# Altium PCB INDICATOR.PcbDoc
Units mm, origin at the board's own origin, x right, y up, seen from the top; angles counter-clockwise.
Board outline 148 x 64 mm, 2 copper layers (Top Layer, Bottom Layer); 90 components, 79 nets, 322 pads, 0 vias.
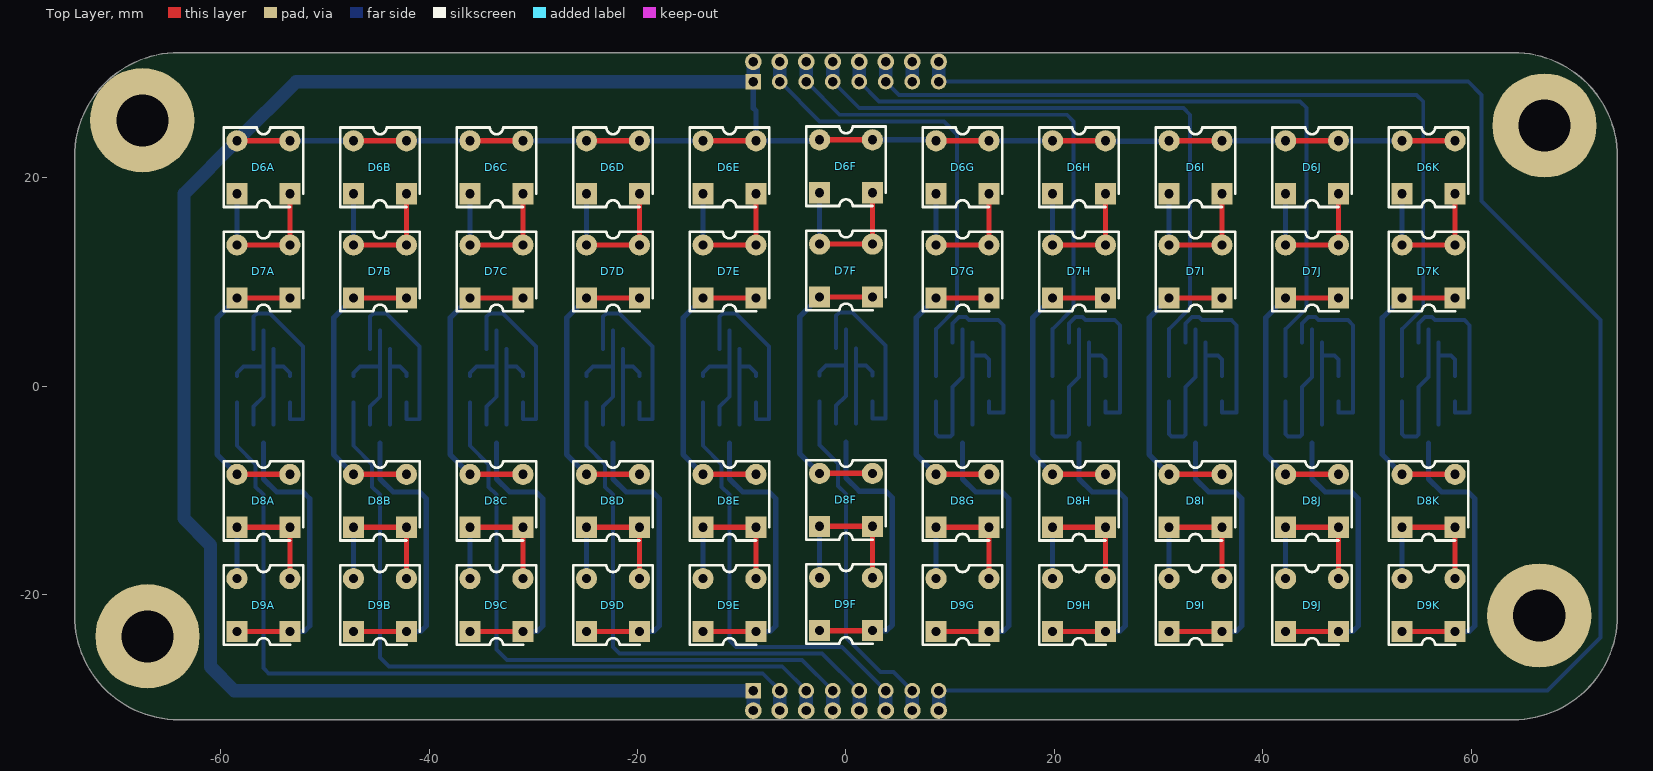
[diagram p0: Top Layer view]
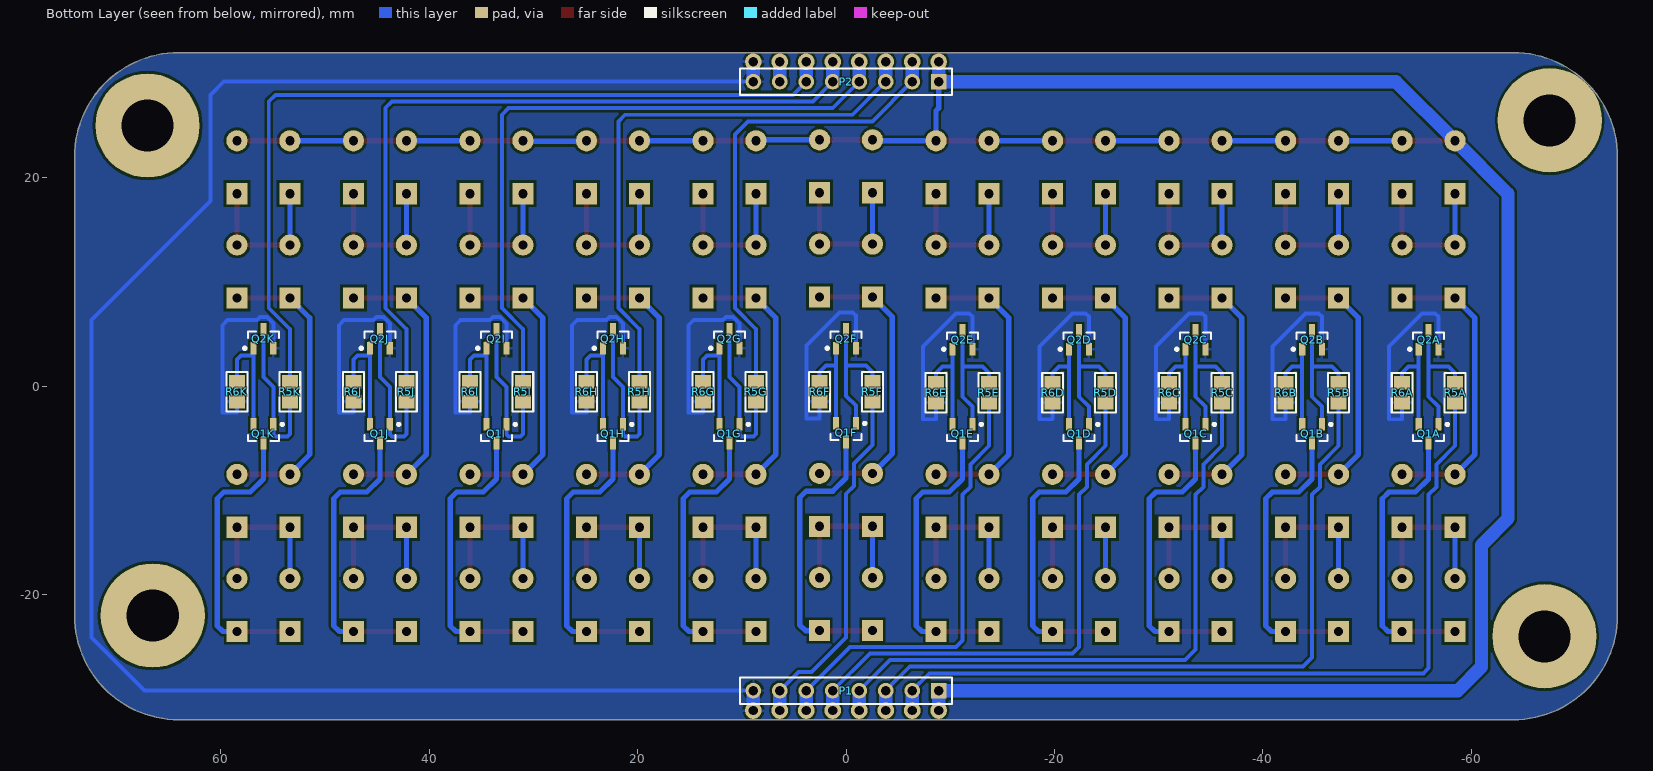
[diagram p1: Bottom Layer view, seen from below]
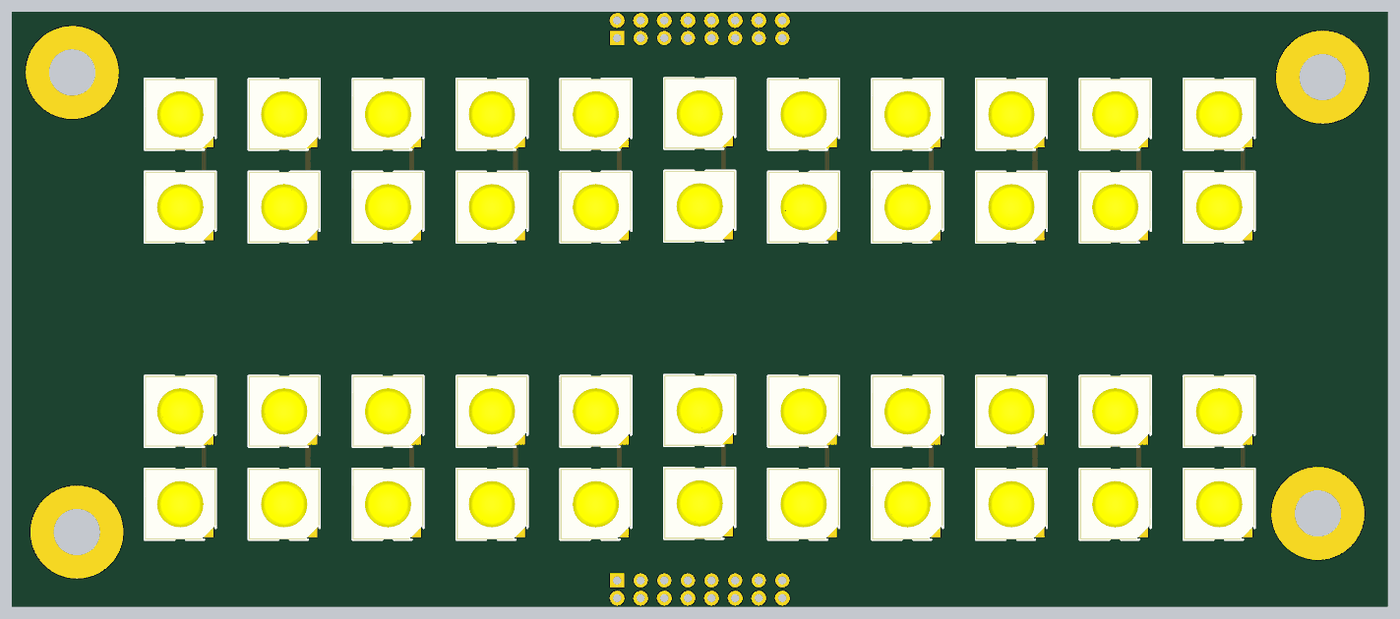
[diagram p2: 3D render of the assembled board from above, using the file's embedded part models]

## Layer stack, top to bottom
Top Solder: solder mask 0.0102, Solder Resist, Dk 3.5
Top Layer: signal copper 0.0356
Dielectric1: dielectric 0.32, FR-4, Dk 4.8
Bottom Layer: signal copper 0.0356
Bottom Solder: solder mask 0.0102, Solder Resist, Dk 3.5

## Board outline
-74,-22 -74,22 cw(c-64,22) -64,32 64,32 cw(c64,22) 74,22 74,-22 cw(c64,-22) 64,-32 -64,-32 cw(c-64,-22)

## Design rules (kind name [scope] priority, off if disabled: settings)
Clearance [All] p1: gap=0.254
PolygonConnect [All] p1: connectstyle=Relief reliefconductorwidth=0.254 reliefentries=4 polygonreliefangle="90 Angle" airgapwidth=0.254
RoomDefinition U_LEDSANDDRIVER6 [InComponentClass('U_LEDSANDDRIVER6')] p1: confinementstyle=ConfineIn formatcopy=FALSE lockcomponents=FALSE outline -5.588,-25.908 5.588,-25.908 5.588,26.092 -5.588,26.092
RoomDefinition INDICATOR [InComponentClass('INDICATOR')] p2: confinementstyle=ConfineIn formatcopy=TRUE lockcomponents=FALSE outline -73.66,-32 74.168,-32 74.168,32 -73.66,32
RoomDefinition U_LEDSANDDRIVER11 [InComponentClass('U_LEDSANDDRIVER11')] p3: confinementstyle=ConfineIn formatcopy=TRUE lockcomponents=FALSE outline 50.292,-26 61.468,-26 61.468,26 50.292,26
RoomDefinition U_LEDSANDDRIVER10 [InComponentClass('U_LEDSANDDRIVER10')] p4: confinementstyle=ConfineIn formatcopy=TRUE lockcomponents=FALSE outline 39.116,-26 50.292,-26 50.292,26 39.116,26
RoomDefinition U_LEDSANDDRIVER9 [InComponentClass('U_LEDSANDDRIVER9')] p5: confinementstyle=ConfineIn formatcopy=TRUE lockcomponents=FALSE outline 27.94,-26 39.116,-26 39.116,26 27.94,26
RoomDefinition U_LEDSANDDRIVER8 [InComponentClass('U_LEDSANDDRIVER8')] p6: confinementstyle=ConfineIn formatcopy=TRUE lockcomponents=FALSE outline 16.764,-26 27.94,-26 27.94,26 16.764,26
RoomDefinition U_LEDSANDDRIVER7 [InComponentClass('U_LEDSANDDRIVER7')] p7: confinementstyle=ConfineIn formatcopy=TRUE lockcomponents=FALSE outline 5.588,-26 16.764,-26 16.764,26 5.588,26
RoomDefinition U_LEDSANDDRIVER5 [InComponentClass('U_LEDSANDDRIVER5')] p8: confinementstyle=ConfineIn formatcopy=FALSE lockcomponents=FALSE outline -16.764,-26 -5.588,-26 -5.588,26 -16.764,26
RoomDefinition U_LEDSANDDRIVER4 [InComponentClass('U_LEDSANDDRIVER4')] p9: confinementstyle=ConfineIn formatcopy=FALSE lockcomponents=FALSE outline -27.94,-26 -16.764,-26 -16.764,26 -27.94,26
RoomDefinition U_LEDSANDDRIVER3 [InComponentClass('U_LEDSANDDRIVER3')] p10: confinementstyle=ConfineIn formatcopy=FALSE lockcomponents=FALSE outline -39.116,-26 -27.94,-26 -27.94,26 -39.116,26
RoomDefinition U_LEDSANDDRIVER2 [InComponentClass('U_LEDSANDDRIVER2')] p11: confinementstyle=ConfineIn formatcopy=FALSE lockcomponents=FALSE outline -50.292,-26 -39.116,-26 -39.116,26 -50.292,26
RoomDefinition U_LEDSANDDRIVER1 [InComponentClass('U_LEDSANDDRIVER1')] p12: confinementstyle=ConfineIn formatcopy=FALSE lockcomponents=FALSE outline -61.468,-26 -50.292,-26 -50.292,26 -61.468,26
RoutingVias [All] p1: holewidth=0.8 width=1.6 viastyle="Through Hole" minholewidth=0.711 minwidth=1.27 maxholewidth=5 maxwidth=40
SolderMaskExpansion [All] p1: expansion=0.102
Width [All] p1: maxlimit=2.54 minlimit=0.254 preferedwidth=0.254
29 further rules are at their usual default settings.

## Classes and differential pairs
net class DRIVE[1..11]: DRIVE1 DRIVE2 DRIVE3 DRIVE4 DRIVE5 DRIVE6 DRIVE7 DRIVE8 DRIVE9 DRIVE10 DRIVE11 DRIVE13 DRIVE14 DRIVE15 DRIVE16
channel class "LEDS AND DRIVER": U_LEDSANDDRIVER1 U_LEDSANDDRIVER2 U_LEDSANDDRIVER3 U_LEDSANDDRIVER4 U_LEDSANDDRIVER5 U_LEDSANDDRIVER6 U_LEDSANDDRIVER7 U_LEDSANDDRIVER8 U_LEDSANDDRIVER9 U_LEDSANDDRIVER10 U_LEDSANDDRIVER11 U_LEDSANDDRIVER12
component class U_LEDSANDDRIVER11: D6K D7K D8K D9K Q1K Q2K R5K R6K
component class U_LEDSANDDRIVER10: D6J D7J D8J D9J Q1J Q2J R5J R6J
component class U_LEDSANDDRIVER9: D6I D7I D8I D9I Q1I Q2I R5I R6I
component class U_LEDSANDDRIVER8: D6H D7H D8H D9H Q1H Q2H R5H R6H
component class U_LEDSANDDRIVER7: D6G D7G D8G D9G Q1G Q2G R5G R6G
component class U_LEDSANDDRIVER6: D6F D7F D8F D9F Q1F Q2F R5F R6F
component class U_LEDSANDDRIVER5: D6E D7E D8E D9E Q1E Q2E R5E R6E
component class U_LEDSANDDRIVER4: D6D D7D D8D D9D Q1D Q2D R5D R6D
component class U_LEDSANDDRIVER3: D6C D7C D8C D9C Q1C Q2C R5C R6C
component class U_LEDSANDDRIVER2: D6B D7B D8B D9B Q1B Q2B R5B R6B
component class U_LEDSANDDRIVER1: D6A D7A D8A D9A Q1A Q2A R5A R6A
component class INDICATOR: P1 P2

## Components (designator, comment, footprint, x,y, rotation, side; value= is the part's Value field where it differs from the comment)
D6A "Value" "LED SUPERFLUX AMBER" -55.88,21 r180 top (schematic designator D6)
D6B "Value" "LED SUPERFLUX AMBER" -44.704,21 r180 top (schematic designator D6)
D6C "Value" "LED SUPERFLUX AMBER" -33.528,21 r180 top (schematic designator D6)
D6D "Value" "LED SUPERFLUX AMBER" -22.352,21 r180 top (schematic designator D6)
D6E "Value" "LED SUPERFLUX AMBER" -11.176,21 r180 top (schematic designator D6)
D6F "Value" "LED SUPERFLUX AMBER" 0,21.092 r180 top (schematic designator D6)
D6G "Value" "LED SUPERFLUX AMBER" 11.176,21 r180 top (schematic designator D6)
D6H "Value" "LED SUPERFLUX AMBER" 22.352,21 r180 top (schematic designator D6)
D6I "Value" "LED SUPERFLUX AMBER" 33.528,21 r180 top (schematic designator D6)
D6J "Value" "LED SUPERFLUX AMBER" 44.704,21 r180 top (schematic designator D6)
D6K "Value" "LED SUPERFLUX AMBER" 55.88,21 r180 top (schematic designator D6)
D7A "Value" "LED SUPERFLUX AMBER" -55.88,11 r180 top (schematic designator D7)
D7B "Value" "LED SUPERFLUX AMBER" -44.704,11 r180 top (schematic designator D7)
D7C "Value" "LED SUPERFLUX AMBER" -33.528,11 r180 top (schematic designator D7)
D7D "Value" "LED SUPERFLUX AMBER" -22.352,11 r180 top (schematic designator D7)
D7E "Value" "LED SUPERFLUX AMBER" -11.176,11 r180 top (schematic designator D7)
D7F "Value" "LED SUPERFLUX AMBER" 0,11.092 r180 top (schematic designator D7)
D7G "Value" "LED SUPERFLUX AMBER" 11.176,11 r180 top (schematic designator D7)
D7H "Value" "LED SUPERFLUX AMBER" 22.352,11 r180 top (schematic designator D7)
D7I "Value" "LED SUPERFLUX AMBER" 33.528,11 r180 top (schematic designator D7)
D7J "Value" "LED SUPERFLUX AMBER" 44.704,11 r180 top (schematic designator D7)
D7K "Value" "LED SUPERFLUX AMBER" 55.88,11 r180 top (schematic designator D7)
D8A "Value" "LED SUPERFLUX AMBER" -55.88,-11 r180 top (schematic designator D8)
D8B "Value" "LED SUPERFLUX AMBER" -44.704,-11 r180 top (schematic designator D8)
D8C "Value" "LED SUPERFLUX AMBER" -33.528,-11 r180 top (schematic designator D8)
D8D "Value" "LED SUPERFLUX AMBER" -22.352,-11 r180 top (schematic designator D8)
D8E "Value" "LED SUPERFLUX AMBER" -11.176,-11 r180 top (schematic designator D8)
D8F "Value" "LED SUPERFLUX AMBER" 0,-10.908 r180 top (schematic designator D8)
D8G "Value" "LED SUPERFLUX AMBER" 11.176,-11 r180 top (schematic designator D8)
D8H "Value" "LED SUPERFLUX AMBER" 22.352,-11 r180 top (schematic designator D8)
D8I "Value" "LED SUPERFLUX AMBER" 33.528,-11 r180 top (schematic designator D8)
D8J "Value" "LED SUPERFLUX AMBER" 44.704,-11 r180 top (schematic designator D8)
D8K "Value" "LED SUPERFLUX AMBER" 55.88,-11 r180 top (schematic designator D8)
D9A "Value" "LED SUPERFLUX AMBER" -55.88,-21 r180 top (schematic designator D9)
D9B "Value" "LED SUPERFLUX AMBER" -44.704,-21 r180 top (schematic designator D9)
D9C "Value" "LED SUPERFLUX AMBER" -33.528,-21 r180 top (schematic designator D9)
D9D "Value" "LED SUPERFLUX AMBER" -22.352,-21 r180 top (schematic designator D9)
D9E "Value" "LED SUPERFLUX AMBER" -11.176,-21 r180 top (schematic designator D9)
D9F "Value" "LED SUPERFLUX AMBER" 0,-20.908 r180 top (schematic designator D9)
D9G "Value" "LED SUPERFLUX AMBER" 11.176,-21 r180 top (schematic designator D9)
D9H "Value" "LED SUPERFLUX AMBER" 22.352,-21 r180 top (schematic designator D9)
D9I "Value" "LED SUPERFLUX AMBER" 33.528,-21 r180 top (schematic designator D9)
D9J "Value" "LED SUPERFLUX AMBER" 44.704,-21 r180 top (schematic designator D9)
D9K "Value" "LED SUPERFLUX AMBER" 55.88,-21 r180 top (schematic designator D9)
P1 "Header 8" HDR1X8 -8.89,-29.21 r0 bottom
P2 "Header 8" HDR1X8 -8.89,29.21 r0 bottom
Q1A "BC817" SOT23-3L -55.88,-4.572 r270 bottom (schematic designator Q1)
Q1B "BC817" SOT23-3L -44.704,-4.572 r270 bottom (schematic designator Q1)
Q1C "BC817" SOT23-3L -33.528,-4.572 r270 bottom (schematic designator Q1)
Q1D "BC817" SOT23-3L -22.352,-4.572 r270 bottom (schematic designator Q1)
Q1E "BC817" SOT23-3L -11.176,-4.572 r270 bottom (schematic designator Q1)
Q1F "BC817" SOT23-3L 0,-4.48 r270 bottom (schematic designator Q1)
Q1G "BC817" SOT23-3L 11.176,-4.572 r270 bottom (schematic designator Q1)
Q1H "BC817" SOT23-3L 22.352,-4.572 r270 bottom (schematic designator Q1)
Q1I "BC817" SOT23-3L 33.528,-4.572 r270 bottom (schematic designator Q1)
Q1J "BC817" SOT23-3L 44.704,-4.572 r270 bottom (schematic designator Q1)
Q1K "BC817" SOT23-3L 55.88,-4.572 r270 bottom (schematic designator Q1)
Q2A "BC817" SOT23-3L -55.88,4.445 r90 bottom (schematic designator Q2)
Q2B "BC817" SOT23-3L -44.704,4.445 r90 bottom (schematic designator Q2)
Q2C "BC817" SOT23-3L -33.528,4.445 r90 bottom (schematic designator Q2)
Q2D "BC817" SOT23-3L -22.352,4.445 r90 bottom (schematic designator Q2)
Q2E "BC817" SOT23-3L -11.176,4.445 r90 bottom (schematic designator Q2)
Q2F "BC817" SOT23-3L 0,4.537 r90 bottom (schematic designator Q2)
Q2G "BC817" SOT23-3L 11.176,4.537 r90 bottom (schematic designator Q2)
Q2H "BC817" SOT23-3L 22.352,4.537 r90 bottom (schematic designator Q2)
Q2I "BC817" SOT23-3L 33.528,4.537 r90 bottom (schematic designator Q2)
Q2J "BC817" SOT23-3L 44.704,4.537 r90 bottom (schematic designator Q2)
Q2K "BC817" SOT23-3L 55.88,4.537 r90 bottom (schematic designator Q2)
R5A "1k" "RES (3D) - 0805" -58.42,-0.635 r270 bottom (schematic designator R5)
R5B "1k" "RES (3D) - 0805" -47.244,-0.635 r270 bottom (schematic designator R5)
R5C "1k" "RES (3D) - 0805" -36.068,-0.635 r270 bottom (schematic designator R5)
R5D "1k" "RES (3D) - 0805" -24.892,-0.635 r270 bottom (schematic designator R5)
R5E "1k" "RES (3D) - 0805" -13.716,-0.635 r270 bottom (schematic designator R5)
R5F "1k" "RES (3D) - 0805" -2.54,-0.543 r270 bottom (schematic designator R5)
R5G "1k" "RES (3D) - 0805" 8.636,-0.543 r90 bottom (schematic designator R5)
R5H "1k" "RES (3D) - 0805" 19.812,-0.543 r90 bottom (schematic designator R5)
R5I "1k" "RES (3D) - 0805" 30.988,-0.543 r90 bottom (schematic designator R5)
R5J "1k" "RES (3D) - 0805" 42.164,-0.543 r90 bottom (schematic designator R5)
R5K "1k" "RES (3D) - 0805" 53.34,-0.543 r90 bottom (schematic designator R5)
R6A "35R" "RES (3D) - 0805" -53.34,-0.635 r90 bottom (schematic designator R6)
R6B "35R" "RES (3D) - 0805" -42.164,-0.635 r90 bottom (schematic designator R6)
R6C "35R" "RES (3D) - 0805" -30.988,-0.635 r90 bottom (schematic designator R6)
R6D "35R" "RES (3D) - 0805" -19.812,-0.635 r90 bottom (schematic designator R6)
R6E "35R" "RES (3D) - 0805" -8.636,-0.635 r90 bottom (schematic designator R6)
R6F "35R" "RES (3D) - 0805" 2.54,-0.543 r90 bottom (schematic designator R6)
R6G "35R" "RES (3D) - 0805" 13.716,-0.543 r90 bottom (schematic designator R6)
R6H "35R" "RES (3D) - 0805" 24.892,-0.543 r90 bottom (schematic designator R6)
R6I "35R" "RES (3D) - 0805" 36.068,-0.543 r90 bottom (schematic designator R6)
R6J "35R" "RES (3D) - 0805" 47.244,-0.543 r90 bottom (schematic designator R6)
R6K "35R" "RES (3D) - 0805" 58.42,-0.543 r90 bottom (schematic designator R6)

## Footprints (in the part's own frame and the unit in brackets; to place one, negate y for a bottom-side part, rotate by r counter-clockwise, add the part's x,y. Pads: shape width x height; smd on the part's side, far side on the other; paste and mask are expansions set on the pad)
HDR1X8 [mm] "Connector; Header; 8 Position"
  rect 1.5x1.5 hole 0.9: 1(0,0)
  round 1.5 hole 0.9: 2(2.54,0) 3(5.08,0) 4(7.62,0) 5(10.16,0) 6(12.7,0) 7(15.24,0) 8(17.78,0)
  silkscreen extent -1.27,-1.27 19.05,1.27
"LED SUPERFLUX AMBER" [mil]
  round 80 hole 35: 1(-100,-100) 1(100,-100)
  rect 80x80 hole 35: 2(-100,100) 2(100,100)
  silkscreen extent -150,-150 150,150, body extent -150,-150 150,150, height 272
"RES (3D) - 0805" [mm]
  rect 1.3x1.5 smd: 1(-0.95,0) 2(0.95,0)
  silkscreen extent -1.91,-0.99 1.91,0.99, body extent -1,-0.63 1,0.63, height 1
SOT23-3L [mm] "SOT23, 3-Leads, Body 2.9x1.3mm, Pitch 0.95mm, Lead Span 2.5mm, IPC High Density"
  rect 1.2x0.6 smd: 1(-0.9,0.95) 2(-0.9,-0.95) 3(0.9,0)
  silkscreen extent -1.02,-1.5 0.7,1.92, body extent -1.25,-1.5 1.25,1.5, height 1.12

## Part data
D6A D6B D6C D6D D6E D6F D6G D6H D6I D6J D6K D7A D7B D7C D7D D7E D7F D7G D7H D7I D7J D7K D8A D8B D8C D8D D8E D8F D8G D8H D8I D8J D8K D9A D9B D9C D9D D9E D9F D9G D9H D9I D9J D9K: library part "LED 3mm RED", "LED 55"
P1 P2: "Header, 8-Pin"
Q1A Q1B Q1C Q1D Q1E Q1F Q1G Q1H Q1I Q1J Q1K Q2A Q2B Q2C Q2D Q2E Q2F Q2G Q2H Q2I Q2J Q2K: "NPN Bipolar Transistor"
R5A R5B R5C R5D R5E R5F R5G R5H R5I R5J R5K R6A R6B R6C R6D R6E R6F R6G R6H R6I R6J R6K: library part "RES SMD 0603 1k", "RESISTOR SMD 0603 1k"

## Free pads (board coordinates)
  round 10 hole 5: 0(-67.5,25.5) 0(-67,-24) 0(66.5,-22) 0(67,25)
  round 1.6 hole 0.9: 0(-8.89,31.115) 0(-8.89,-31.115) 0(-6.35,31.115) 0(-6.35,-31.115) 0(-3.81,31.115) 0(-3.81,-31.115) 0(-1.27,31.115) 0(-1.27,-31.115) 0(1.27,31.115) 0(1.27,-31.115) 0(3.81,31.115) 0(3.81,-31.115) 0(6.35,31.115) 0(6.35,-31.115) 0(8.89,31.115) 0(8.89,-31.115)

## Nets (pads, with @x,y where several pads share a name; then routed paths per layer and width w, separated by ;. In a path a pad name is that pad's centre, name@x,y a point inside that pad or via, vN(x,y) a via of type N, cw(c..) or ccw(c..) an arc to the next point about the centre after c; other vN are vias at no path point)
DRIVE1: P1.2 pad.0@-6.35,-31.115 R5A.2 | length 78.8
  Bottom Layer w0.381: R5A.2 -58.42,-5.715 -56.642,-7.493 -56.642,-9.652 -55.88,-10.414 -55.88,-27.051 -55.39,-27.541 -8.019,-27.541 P1.2
  Bottom Layer w1.27: pad.0@-6.35,-31.115 P1.2
DRIVE2: P1.3 pad.0@-3.81,-31.115 R5B.2 | length 69.6
  Bottom Layer w0.381: R5B.2 -47.244,-5.715 -45.466,-7.493 -45.466,-9.652 -44.704,-10.414 -44.704,-26.035 -43.833,-26.906 -6.114,-26.906 P1.3
  Bottom Layer w1.27: pad.0@-3.81,-31.115 P1.3
DRIVE3: P1.4 pad.0@-1.27,-31.115 R5C.2 | length 60.5
  Bottom Layer w0.381: R5C.2 -36.068,-5.715 -34.29,-7.493 -34.29,-9.652 -33.528,-10.414 -33.528,-25.273 -32.53,-26.271 -4.209,-26.271 P1.4
  Bottom Layer w1.27: pad.0@-1.27,-31.115 P1.4
DRIVE4: P1.5 pad.0@1.27,-31.115 R5D.2 | length 51.1
  Bottom Layer w0.381: R5D.2 -24.892,-5.715 -23.114,-7.493 -23.114,-9.652 -22.352,-10.414 -22.352,-25.019 -21.735,-25.636 -2.304,-25.636 P1.5
  Bottom Layer w1.27: pad.0@1.27,-30.48 P1.5
DRIVE5: P1.6 pad.0@3.81,-31.115 R5E.2 | length 42.7
  Bottom Layer w0.381: R5E.2 -13.716,-5.715 -11.938,-7.493 -11.938,-9.652 -11.176,-10.414 -11.176,-24.384 -10.559,-25.001 -0.399,-25.001 P1.6
  Bottom Layer w1.27: pad.0@3.81,-31.115 P1.6
DRIVE6: P1.7 pad.0@6.35,-31.115 R5F.2 | length 34
  Bottom Layer w0.381: R5F.2 -2.54,-5.623 -0.762,-7.401 -0.762,-9.56 0,-10.322 0,-24.13 3.302,-27.432 4.572,-27.432 P1.7
  Bottom Layer w1.27: pad.0@6.35,-31.115 P1.7
DRIVE7: P2.2 pad.0@-6.35,31.115 R5G.2 | length 45
  Bottom Layer w0.381: P2.2 -2.54,25.4 9.398,25.4 10.668,24.13 10.668,7.493 8.636,5.461 R5G.2@8.636,0.95
  Bottom Layer w1.27: P2.2 pad.0@-6.35,31.115
DRIVE8: P2.3 pad.0@-3.81,31.115 R5H.2 | length 53.8
  Bottom Layer w0.381: P2.3 -0.635,26.035 21.209,26.035 21.844,25.4 21.844,7.493 19.812,5.461 R5H.2@19.812,0.95
  Bottom Layer w1.27: P2.3@-3.81,29.845 pad.0@-3.81,31.115
DRIVE9: P2.4 pad.0@-1.27,31.115 R5I.2 | length 79.3
  Bottom Layer w0.381: P2.4 1.27,26.67 32.385,26.67 33.02,26.035 33.02,24.13 ; R5I.2@30.988,0.95 30.988,5.461 33.02,7.493 33.02,24.13 ; 33.02,7.62 33.02,24.13
  Bottom Layer w1.27: P2.4@-1.27,29.845 pad.0@-1.27,31.115
DRIVE10: P2.5 pad.0@1.27,31.115 R5J.2 | length 89
  Bottom Layer w0.381: P2.5 3.175,27.305 43.561,27.305 44.196,26.67 44.196,7.62 ; R5J.2@42.164,0.95 42.164,5.461 44.196,7.493 44.196,24.13
  Bottom Layer w1.27: P2.5 pad.0@1.27,31.115
DRIVE11: P2.6 pad.0@3.81,31.115 R5K.2 | length 97.3
  Bottom Layer w0.381: P2.6 5.08,27.94 54.737,27.94 55.372,27.305 55.372,7.62 ; R5K.2@53.34,0.95 53.34,5.461 55.372,7.493 55.372,24.13
  Bottom Layer w1.27: P2.6@3.81,29.845 pad.0@3.81,31.115
GND: P1.8 P2.8 pad.0@8.89,31.115 pad.0@8.89,-31.115 Q2A.2 Q2B.2 Q2C.2 Q2D.2 Q2E.2 Q2F.2 Q2G.2 Q2H.2 Q2I.2 Q2J.2 Q2K.2 R6A.1 R6B.1 R6C.1 R6D.1 R6E.1 R6F.1 R6G.1 R6H.1 R6I.1 R6J.1 R6K.1 | length 384.5
  Bottom Layer w0.381: Q2A.2 -56.83,6.67 -56.515,6.985 -55.245,6.985 -52.07,3.81 -52.07,-3.175 -53.34,-3.175 R6A.1 ; Q2B.2 -45.654,6.67 -45.339,6.985 -44.069,6.985 -40.894,3.81 -40.894,-3.175 -42.164,-3.175 R6B.1 ; Q2C.2 -34.478,6.67 -34.163,6.985 -32.893,6.985 -29.718,3.81 -29.718,-3.175 -30.988,-3.175 R6C.1 ; Q2D.2 -23.302,6.67 -22.987,6.985 -21.717,6.985 -18.542,3.81 -18.542,-3.175 -19.812,-3.175 R6D.1 ; Q2E.2 -12.126,6.67 -11.811,6.985 -10.541,6.985 -7.366,3.81 -7.366,-3.175 -8.636,-3.175 R6E.1 ; Q2F.2 -0.95,6.762 -0.635,7.077 0.635,7.077 3.81,3.902 3.81,-3.083 2.54,-3.083 R6F.1 ; P1.8 67.31,-29.21 72.39,-24.13 72.39,6.35 60.96,17.78 60.96,27.94 59.69,29.21 P2.8 ; Q2G.2@10.226,4.18 10.226,6.016 10.825,6.615 11.527,6.615 11.792,6.35 14.605,6.35 15.113,5.842 15.113,-2.54 13.716,-2.54 R6G.1 ; Q2H.2@21.402,4.18 21.402,6.016 22.001,6.615 22.703,6.615 22.968,6.35 25.781,6.35 26.289,5.842 26.289,-2.54 24.892,-2.54 R6H.1 ; Q2I.2@32.578,4.18 32.578,6.016 33.177,6.615 33.879,6.615 34.144,6.35 36.957,6.35 37.465,5.842 37.465,-2.54 36.068,-2.54 R6I.1 ; Q2J.2@43.754,4.18 43.754,6.016 44.353,6.615 45.055,6.615 45.32,6.35 48.133,6.35 48.641,5.842 48.641,-2.54 47.244,-2.54 R6J.1 ; Q2K.2@54.93,4.18 54.93,6.016 55.529,6.615 56.231,6.615 56.496,6.35 59.309,6.35 59.817,5.842 59.817,-2.54 58.42,-2.54 R6K.1
  Bottom Layer w1.27: pad.0@8.89,-31.115 P1.8 ; P2.8 pad.0@8.89,31.115
NetD6A_2: D6A.2 D7A.1 | length 14.9
  Top Layer w0.508: D7A.1@-58.42,13.54 -53.34,13.54 D6A.2@-53.34,18.46
  Bottom Layer w0.508: D7A.1@-58.42,13.54 D6A.2@-58.42,18.46
NetD6B_2: D6B.2 D7B.1 | length 14.9
  Top Layer w0.508: D7B.1@-47.244,13.54 -42.164,13.54 D6B.2@-42.164,18.46
  Bottom Layer w0.508: D7B.1@-47.244,13.54 D6B.2@-47.244,18.46
NetD6C_2: D6C.2 D7C.1 | length 14.9
  Top Layer w0.508: D7C.1@-36.068,13.54 -30.988,13.54 D6C.2@-30.988,18.46
  Bottom Layer w0.508: D7C.1@-36.068,13.54 D6C.2@-36.068,18.46
NetD6D_2: D6D.2 D7D.1 | length 14.9
  Top Layer w0.508: D7D.1@-24.892,13.54 -19.812,13.54 D6D.2@-19.812,18.46
  Bottom Layer w0.508: D7D.1@-24.892,13.54 D6D.2@-24.892,18.46
NetD6E_2: D6E.2 D7E.1 | length 14.9
  Top Layer w0.508: D7E.1@-13.716,13.54 -8.636,13.54 D6E.2@-8.636,18.46
  Bottom Layer w0.508: D7E.1@-13.716,13.54 D6E.2@-13.716,18.46
NetD6F_2: D6F.2 D7F.1 | length 14.9
  Top Layer w0.508: D7F.1@-2.54,13.632 D7F.1@2.54,13.632 ; D7F.1@2.54,13.632 D6F.2@2.54,18.552
  Bottom Layer w0.508: D7F.1@-2.54,13.632 D6F.2@-2.54,18.552
NetD6G_2: D6G.2 D7G.1 | length 14.9
  Top Layer w0.508: D7G.1@8.636,13.54 13.716,13.54 D6G.2@13.716,18.46
  Bottom Layer w0.508: D7G.1@8.636,13.54 D6G.2@8.636,18.46
NetD6H_2: D6H.2 D7H.1 | length 14.9
  Top Layer w0.508: D7H.1@19.812,13.54 24.892,13.54 D6H.2@24.892,18.46
  Bottom Layer w0.508: D7H.1@19.812,13.54 D6H.2@19.812,18.46
NetD6I_2: D6I.2 D7I.1 | length 14.9
  Top Layer w0.508: D7I.1@30.988,13.54 36.068,13.54 D6I.2@36.068,18.46
  Bottom Layer w0.508: D7I.1@30.988,13.54 D6I.2@30.988,18.46
NetD6J_2: D6J.2 D7J.1 | length 14.9
  Top Layer w0.508: D7J.1@42.164,13.54 47.244,13.54 D6J.2@47.244,18.46
  Bottom Layer w0.508: D7J.1@42.164,13.54 D6J.2@42.164,18.46
NetD6K_2: D6K.2 D7K.1 | length 14.9
  Top Layer w0.508: D7K.1@53.34,13.54 58.42,13.54 D6K.2@58.42,18.46
  Bottom Layer w0.508: D7K.1@53.34,13.54 D6K.2@53.34,18.46
NetD7A_2: D7A.2 D8A.1 | length 28.7
  Top Layer w0.508: D8A.1@-58.42,-8.46 D8A.1@-53.34,-8.46 ; D7A.2@-58.42,8.46 D7A.2@-53.34,8.46
  Bottom Layer w0.508: D8A.1@-58.42,-8.46 -60.325,-6.555 -60.325,6.555 D7A.2@-58.42,8.46
NetD7B_2: D7B.2 D8B.1 | length 28.7
  Top Layer w0.508: D8B.1@-47.244,-8.46 D8B.1@-42.164,-8.46 ; D7B.2@-47.244,8.46 D7B.2@-42.164,8.46
  Bottom Layer w0.508: D8B.1@-47.244,-8.46 -49.149,-6.555 -49.149,6.555 D7B.2@-47.244,8.46
NetD7C_2: D7C.2 D8C.1 | length 28.7
  Top Layer w0.508: D8C.1@-36.068,-8.46 D8C.1@-30.988,-8.46 ; D7C.2@-36.068,8.46 D7C.2@-30.988,8.46
  Bottom Layer w0.508: D8C.1@-36.068,-8.46 -37.973,-6.555 -37.973,6.555 D7C.2@-36.068,8.46
NetD7D_2: D7D.2 D8D.1 | length 28.7
  Top Layer w0.508: D8D.1@-24.892,-8.46 D8D.1@-19.812,-8.46 ; D7D.2@-24.892,8.46 D7D.2@-19.812,8.46
  Bottom Layer w0.508: D8D.1@-24.892,-8.46 -26.797,-6.555 -26.797,6.555 D7D.2@-24.892,8.46
NetD7E_2: D7E.2 D8E.1 | length 28.7
  Top Layer w0.508: D8E.1@-13.716,-8.46 D8E.1@-8.636,-8.46 ; D7E.2@-13.716,8.46 D7E.2@-8.636,8.46
  Bottom Layer w0.508: D8E.1@-13.716,-8.46 -15.621,-6.555 -15.621,6.555 D7E.2@-13.716,8.46
NetD7F_2: D7F.2 D8F.1 | length 28.7
  Top Layer w0.508: D8F.1@-2.54,-8.368 D8F.1@2.54,-8.368 ; D7F.2@-2.54,8.552 D7F.2@2.54,8.552
  Bottom Layer w0.508: D8F.1@-2.54,-8.368 -4.445,-6.463 -4.445,6.647 D7F.2@-2.54,8.552
NetD7G_2: D7G.2 D8G.1 | length 28.7
  Top Layer w0.508: D8G.1@8.636,-8.46 D8G.1@13.716,-8.46 ; D7G.2@8.636,8.46 D7G.2@13.716,8.46
  Bottom Layer w0.508: D8G.1@8.636,-8.46 6.731,-6.555 6.731,6.555 D7G.2@8.636,8.46
NetD7H_2: D7H.2 D8H.1 | length 28.7
  Top Layer w0.508: D8H.1@19.812,-8.46 D8H.1@24.892,-8.46 ; D7H.2@19.812,8.46 D7H.2@24.892,8.46
  Bottom Layer w0.508: D8H.1@19.812,-8.46 17.907,-6.555 17.907,6.555 D7H.2@19.812,8.46
NetD7I_2: D7I.2 D8I.1 | length 28.7
  Top Layer w0.508: D8I.1@30.988,-8.46 D8I.1@36.068,-8.46 ; D7I.2@30.988,8.46 D7I.2@36.068,8.46
  Bottom Layer w0.508: D8I.1@30.988,-8.46 29.083,-6.555 29.083,6.555 D7I.2@30.988,8.46
NetD7J_2: D7J.2 D8J.1 | length 28.7
  Top Layer w0.508: D8J.1@42.164,-8.46 D8J.1@47.244,-8.46 ; D7J.2@42.164,8.46 D7J.2@47.244,8.46
  Bottom Layer w0.508: D8J.1@42.164,-8.46 40.259,-6.555 40.259,6.555 D7J.2@42.164,8.46
NetD7K_2: D7K.2 D8K.1 | length 28.7
  Top Layer w0.508: D8K.1@53.34,-8.46 D8K.1@58.42,-8.46 ; D7K.2@53.34,8.46 D7K.2@58.42,8.46
  Bottom Layer w0.508: D8K.1@53.34,-8.46 51.435,-6.555 51.435,6.555 D7K.2@53.34,8.46
NetD8A_2: D8A.2 D9A.1 | length 14.9
  Top Layer w0.508: D8A.2@-58.42,-13.54 -53.34,-13.54 D9A.1@-53.34,-18.46
  Bottom Layer w0.508: D9A.1@-58.42,-18.46 D8A.2@-58.42,-13.54
NetD8B_2: D8B.2 D9B.1 | length 14.9
  Top Layer w0.508: D8B.2@-47.244,-13.54 -42.164,-13.54 D9B.1@-42.164,-18.46
  Bottom Layer w0.508: D9B.1@-47.244,-18.46 D8B.2@-47.244,-13.54
NetD8C_2: D8C.2 D9C.1 | length 14.9
  Top Layer w0.508: D8C.2@-36.068,-13.54 -30.988,-13.54 D9C.1@-30.988,-18.46
  Bottom Layer w0.508: D9C.1@-36.068,-18.46 D8C.2@-36.068,-13.54
NetD8D_2: D8D.2 D9D.1 | length 14.9
  Top Layer w0.508: D8D.2@-24.892,-13.54 -19.812,-13.54 D9D.1@-19.812,-18.46
  Bottom Layer w0.508: D9D.1@-24.892,-18.46 D8D.2@-24.892,-13.54
NetD8E_2: D8E.2 D9E.1 | length 14.9
  Top Layer w0.508: D8E.2@-13.716,-13.54 -8.636,-13.54 D9E.1@-8.636,-18.46
  Bottom Layer w0.508: D9E.1@-13.716,-18.46 D8E.2@-13.716,-13.54
NetD8F_2: D8F.2 D9F.1 | length 14.9
  Top Layer w0.508: D8F.2@-2.54,-13.448 2.54,-13.448 D9F.1@2.54,-18.368
  Bottom Layer w0.508: D9F.1@-2.54,-18.368 D8F.2@-2.54,-13.448
NetD8G_2: D8G.2 D9G.1 | length 14.9
  Top Layer w0.508: D8G.2@8.636,-13.54 13.716,-13.54 D9G.1@13.716,-18.46
  Bottom Layer w0.508: D9G.1@8.636,-18.46 D8G.2@8.636,-13.54
NetD8H_2: D8H.2 D9H.1 | length 14.9
  Top Layer w0.508: D8H.2@19.812,-13.54 24.892,-13.54 D9H.1@24.892,-18.46
  Bottom Layer w0.508: D9H.1@19.812,-18.46 D8H.2@19.812,-13.54
NetD8I_2: D8I.2 D9I.1 | length 14.9
  Top Layer w0.508: D8I.2@30.988,-13.54 36.068,-13.54 D9I.1@36.068,-18.46
  Bottom Layer w0.508: D9I.1@30.988,-18.46 D8I.2@30.988,-13.54
NetD8J_2: D8J.2 D9J.1 | length 14.9
  Top Layer w0.508: D8J.2@42.164,-13.54 47.244,-13.54 D9J.1@47.244,-18.46
  Bottom Layer w0.508: D9J.1@42.164,-18.46 D8J.2@42.164,-13.54
NetD8K_2: D8K.2 D9K.1 | length 14.9
  Top Layer w0.508: D8K.2@53.34,-13.54 58.42,-13.54 D9K.1@58.42,-18.46
  Bottom Layer w0.508: D9K.1@53.34,-18.46 D8K.2@53.34,-13.54
NetD9A_2: D9A.2 Q1A.3 | length 28.1
  Top Layer w0.508: D9A.2@-58.42,-23.54 D9A.2@-53.34,-23.54
  Bottom Layer w0.508: Q1A.3 -55.88,-8.89 -54.61,-10.16 -52.07,-10.16 -51.435,-10.795 -51.435,-22.987 -51.988,-23.54 D9A.2@-53.34,-23.54
NetD9B_2: D9B.2 Q1B.3 | length 28.1
  Top Layer w0.508: D9B.2@-47.244,-23.54 D9B.2@-42.164,-23.54
  Bottom Layer w0.508: Q1B.3 -44.704,-8.89 -43.434,-10.16 -40.894,-10.16 -40.259,-10.795 -40.259,-22.987 -40.812,-23.54 D9B.2@-42.164,-23.54
NetD9C_2: D9C.2 Q1C.3 | length 28.1
  Top Layer w0.508: D9C.2@-36.068,-23.54 D9C.2@-30.988,-23.54
  Bottom Layer w0.508: Q1C.3 -33.528,-8.89 -32.258,-10.16 -29.718,-10.16 -29.083,-10.795 -29.083,-22.987 -29.636,-23.54 D9C.2@-30.988,-23.54
NetD9D_2: D9D.2 Q1D.3 | length 28.1
  Top Layer w0.508: D9D.2@-24.892,-23.54 D9D.2@-19.812,-23.54
  Bottom Layer w0.508: Q1D.3 -22.352,-8.89 -21.082,-10.16 -18.542,-10.16 -17.907,-10.795 -17.907,-22.987 -18.46,-23.54 D9D.2@-19.812,-23.54
NetD9E_2: D9E.2 Q1E.3 | length 28.1
  Top Layer w0.508: D9E.2@-13.716,-23.54 D9E.2@-8.636,-23.54
  Bottom Layer w0.508: Q1E.3 -11.176,-8.89 -9.906,-10.16 -7.366,-10.16 -6.731,-10.795 -6.731,-22.987 -7.284,-23.54 D9E.2@-8.636,-23.54
NetD9F_2: D9F.2 Q1F.3 | length 28.1
  Top Layer w0.508: D9F.2@-2.54,-23.448 D9F.2@2.54,-23.448
  Bottom Layer w0.508: Q1F.3 0,-8.798 1.27,-10.068 3.81,-10.068 4.445,-10.703 4.445,-22.895 3.892,-23.448 D9F.2@2.54,-23.448
NetD9G_2: D9G.2 Q1G.3 | length 28.1
  Top Layer w0.508: D9G.2@8.636,-23.54 D9G.2@13.716,-23.54
  Bottom Layer w0.508: Q1G.3 11.176,-8.89 12.446,-10.16 14.986,-10.16 15.621,-10.795 15.621,-22.987 15.068,-23.54 D9G.2@13.716,-23.54
NetD9H_2: D9H.2 Q1H.3 | length 28.1
  Top Layer w0.508: D9H.2@19.812,-23.54 D9H.2@24.892,-23.54
  Bottom Layer w0.508: Q1H.3 22.352,-8.89 23.622,-10.16 26.162,-10.16 26.797,-10.795 26.797,-22.987 26.244,-23.54 D9H.2@24.892,-23.54
NetD9I_2: D9I.2 Q1I.3 | length 28.1
  Top Layer w0.508: D9I.2@30.988,-23.54 D9I.2@36.068,-23.54
  Bottom Layer w0.508: Q1I.3 33.528,-8.89 34.798,-10.16 37.338,-10.16 37.973,-10.795 37.973,-22.987 37.42,-23.54 D9I.2@36.068,-23.54
NetD9J_2: D9J.2 Q1J.3 | length 28.1
  Top Layer w0.508: D9J.2@42.164,-23.54 D9J.2@47.244,-23.54
  Bottom Layer w0.508: Q1J.3 44.704,-8.89 45.974,-10.16 48.514,-10.16 49.149,-10.795 49.149,-22.987 48.596,-23.54 D9J.2@47.244,-23.54
NetD9K_2: D9K.2 Q1K.3 | length 28.1
  Top Layer w0.508: D9K.2@53.34,-23.54 D9K.2@58.42,-23.54
  Bottom Layer w0.508: Q1K.3 55.88,-8.89 57.15,-10.16 59.69,-10.16 60.325,-10.795 60.325,-22.987 59.772,-23.54 D9K.2@58.42,-23.54
NetQ1A_1: Q1A.1 Q2A.3 R5A.1 | length 12.5
  Bottom Layer w0.381: R5A.1@-58.42,0.95 -58.42,1.27 -57.785,1.905 -55.88,1.905 ; Q1A.1 -56.83,-1.966 -55.88,-1.016 -55.88,1.905 ; Q2A.3 -55.88,1.905
NetQ1A_2: Q1A.2 Q2A.1 R6A.2 | length 9.4
  Bottom Layer w0.381: Q1A.2 -54.93,1.905 ; Q2A.1 -54.93,1.905 ; R6A.2@-53.34,0.95 -53.34,1.27 -53.975,1.905 -54.93,1.905
NetQ1B_1: Q1B.1 Q2B.3 R5B.1 | length 12.5
  Bottom Layer w0.381: R5B.1@-47.244,0.95 -47.244,1.27 -46.609,1.905 -44.704,1.905 ; Q1B.1 -45.654,-1.966 -44.704,-1.016 -44.704,1.905 ; Q2B.3 -44.704,1.905
NetQ1B_2: Q1B.2 Q2B.1 R6B.2 | length 9.4
  Bottom Layer w0.381: Q1B.2 -43.754,1.905 ; Q2B.1 -43.754,1.905 ; R6B.2@-42.164,0.95 -42.164,1.27 -42.799,1.905 -43.754,1.905
NetQ1C_1: Q1C.1 Q2C.3 R5C.1 | length 12.5
  Bottom Layer w0.381: R5C.1@-36.068,0.95 -36.068,1.27 -35.433,1.905 -33.528,1.905 ; Q1C.1 -34.478,-1.966 -33.528,-1.016 -33.528,1.905 ; Q2C.3 -33.528,1.905
NetQ1C_2: Q1C.2 Q2C.1 R6C.2 | length 9.4
  Bottom Layer w0.381: Q1C.2 -32.578,1.905 ; Q2C.1 -32.578,1.905 ; R6C.2@-30.988,0.95 -30.988,1.27 -31.623,1.905 -32.578,1.905
NetQ1D_1: Q1D.1 Q2D.3 R5D.1 | length 12.5
  Bottom Layer w0.381: R5D.1@-24.892,0.95 -24.892,1.27 -24.257,1.905 -22.352,1.905 ; Q1D.1 -23.302,-1.966 -22.352,-1.016 -22.352,1.905 ; Q2D.3 -22.352,1.905
NetQ1D_2: Q1D.2 Q2D.1 R6D.2 | length 9.4
  Bottom Layer w0.381: Q1D.2 -21.402,1.905 ; Q2D.1 -21.402,1.905 ; R6D.2@-19.812,0.95 -19.812,1.27 -20.447,1.905 -21.402,1.905
NetQ1E_1: Q1E.1 Q2E.3 R5E.1 | length 12.5
  Bottom Layer w0.381: R5E.1@-13.716,0.95 -13.716,1.27 -13.081,1.905 -11.176,1.905 ; Q1E.1 -12.126,-1.966 -11.176,-1.016 -11.176,1.905 ; Q2E.3 -11.176,1.905
NetQ1E_2: Q1E.2 Q2E.1 R6E.2 | length 9.4
  Bottom Layer w0.381: Q1E.2 -10.226,1.905 ; Q2E.1 -10.226,1.905 ; R6E.2@-8.636,0.95 -8.636,1.27 -9.271,1.905 -10.226,1.905
NetQ1F_1: Q1F.1 Q2F.3 R5F.1 | length 12.5
  Bottom Layer w0.381: R5F.1@-2.54,1.042 -2.54,1.362 -1.905,1.997 0,1.997 ; Q1F.1 -0.95,-1.874 0,-0.924 0,1.997 ; Q2F.3 0,1.997
NetQ1F_2: Q1F.2 Q2F.1 R6F.2 | length 9.4
  Bottom Layer w0.381: Q1F.2 0.95,1.997 ; Q2F.1 0.95,1.997 ; R6F.2@2.54,1.042 2.54,1.362 1.905,1.997 0.95,1.997
NetQ1G_1: Q1G.1 Q2G.3 R5G.1 | length 15.3
  Bottom Layer w0.381: R5G.1 8.636,-4.572 8.89,-4.826 10.033,-4.826 10.226,-4.633 Q1G.1 10.226,-0.061 11.176,0.889 Q2G.3
NetQ1G_2: Q1G.2 Q2G.1 R6G.2 | length 11.2
  Bottom Layer w0.381: Q1G.2 12.126,2.921 ; Q2G.1@12.126,4.18 12.126,2.921 ; R6G.2@13.716,0.95 13.716,2.54 13.335,2.921 12.126,2.921
NetQ1H_1: Q1H.1 Q2H.3 R5H.1 | length 15.3
  Bottom Layer w0.381: R5H.1 19.812,-4.572 20.066,-4.826 21.209,-4.826 21.402,-4.633 Q1H.1 21.402,-0.061 22.352,0.889 Q2H.3
NetQ1H_2: Q1H.2 Q2H.1 R6H.2 | length 11.2
  Bottom Layer w0.381: Q1H.2 23.302,2.921 ; Q2H.1@23.302,4.18 23.302,2.921 ; R6H.2@24.892,0.95 24.892,2.54 24.511,2.921 23.302,2.921
NetQ1I_1: Q1I.1 Q2I.3 R5I.1 | length 15.3
  Bottom Layer w0.381: R5I.1 30.988,-4.572 31.242,-4.826 32.385,-4.826 32.578,-4.633 Q1I.1 32.578,-0.061 33.528,0.889 Q2I.3
NetQ1I_2: Q1I.2 Q2I.1 R6I.2 | length 11.2
  Bottom Layer w0.381: Q1I.2 34.478,2.921 ; Q2I.1@34.478,4.18 34.478,2.921 ; R6I.2@36.068,0.95 36.068,2.54 35.687,2.921 34.478,2.921
NetQ1J_1: Q1J.1 Q2J.3 R5J.1 | length 15.3
  Bottom Layer w0.381: R5J.1 42.164,-4.572 42.418,-4.826 43.561,-4.826 43.754,-4.633 Q1J.1 43.754,-0.061 44.704,0.889 Q2J.3
NetQ1J_2: Q1J.2 Q2J.1 R6J.2 | length 11.2
  Bottom Layer w0.381: Q1J.2 45.654,2.921 ; Q2J.1@45.654,4.18 45.654,2.921 ; R6J.2@47.244,0.95 47.244,2.54 46.863,2.921 45.654,2.921
NetQ1K_1: Q1K.1 Q2K.3 R5K.1 | length 15.3
  Bottom Layer w0.381: R5K.1 53.34,-4.572 53.594,-4.826 54.737,-4.826 54.93,-4.633 Q1K.1 54.93,-0.061 55.88,0.889 Q2K.3
NetQ1K_2: Q1K.2 Q2K.1 R6K.2 | length 11.2
  Bottom Layer w0.381: Q1K.2 56.83,2.921 ; Q2K.1@56.83,4.18 56.83,2.921 ; R6K.2@58.42,0.95 58.42,2.54 58.039,2.921 56.83,2.921
V+: D6A.1 D6B.1 D6C.1 D6D.1 D6E.1 D6F.1 D6G.1 D6H.1 D6I.1 D6J.1 D6K.1 P1.1 P2.1 pad.0@-8.89,31.115 pad.0@-8.89,-31.115 | length 284.9
  Top Layer w0.508: D6A.1@-58.42,23.54 D6A.1@-53.34,23.54 ; D6B.1@-47.244,23.54 D6B.1@-42.164,23.54 ; D6C.1@-36.068,23.54 D6C.1@-30.988,23.54 ; D6D.1@-24.892,23.54 D6D.1@-19.812,23.54 ; D6E.1@-13.716,23.54 D6E.1@-8.636,23.54 ; D6F.1@-2.54,23.632 D6F.1@2.54,23.632 ; D6G.1@8.636,23.54 D6G.1@13.716,23.54 ; D6H.1@19.812,23.54 D6H.1@24.892,23.54 ; D6I.1@30.988,23.54 D6I.1@36.068,23.54 ; D6J.1@42.164,23.54 D6J.1@47.244,23.54 ; D6K.1@53.34,23.54 D6K.1@58.42,23.54
  Bottom Layer w0.508: D6A.1@-53.34,23.54 D6B.1@-47.244,23.54 ; D6B.1@-42.164,23.54 D6C.1@-36.068,23.54 ; D6C.1@-30.988,23.54 D6D.1@-24.892,23.54 ; D6D.1@-19.812,23.54 D6E.1@-13.716,23.54 ; P2.1 -8.89,26.67 -8.636,26.416 -8.636,23.54 D6F.1@-2.54,23.54 ; D6F.1@2.54,23.632 D6G.1@8.636,23.632 ; D6G.1@13.716,23.54 D6H.1@19.812,23.54 ; D6H.1@24.638,23.495 D6I.1@30.734,23.495 ; D6I.1@36.068,23.54 D6J.1@42.164,23.54 ; D6J.1@47.244,23.54 D6K.1@53.34,23.54
  Bottom Layer w1.27: pad.0@-8.89,-31.115 P1.1 -58.674,-29.21 -60.96,-26.924 -60.96,-15.24 -63.5,-12.7 -63.5,18.46 -58.42,23.54 -52.75,29.21 P2.1 pad.0@-8.89,31.115
pads on no net: P2.7
copper on no net: | length 1.9
  Bottom Layer w1.27: 6.35,29.21 6.35,31.115

## Polygon pours and split planes (outlines as drawn)
GND on Bottom Layer "Mechanical 1-No Net" (solid, pour order 3): -74,-22 -74,22 cw(c-64,22) -64,32 64,32 cw(c64,22) 74,22 74,-22 cw(c64,-22) 64,-32 -64,-32 cw(c-64,-22)

## Silkscreen, mask and mechanical layers (free items; w line width, h text height)
Mechanical 1:
  lines w0.254: -74,-22 ccw(c-64,-22) -64,-32 0,-32 64,-32 ccw(c64,-22) 74,-22 74,0 74,22 ccw(c64,22) 64,32 0,32 -64,32 ccw(c-64,22) -74,22 -74,0 -74,-22
Mechanical 2:
  lines w0.254: -74,-19 -62,-19 -62,-32 ; -74,20 -62,20 -62,32 ; -71.75,0 0,0 71.75,0 ; 61.5,-32 61.5,-17 74,-17 ; 61.5,32 61.5,19.5 74,19.5